# Altium PCB 110-00315-D_B1-DevKit.PcbDoc (part 8 of 9)
Units mil, origin at the board's own origin, x right, y up, seen from the top; angles counter-clockwise.
Board outline 5199.57 x 2702 mil, 8 copper layers (Top Layer, Layer 2-GND-Plane, Layer 3, Layer 4, Layer 5, Layer 6, Layer 7-PWR-Plane, Bottom Layer), stack 60.866 mil thick; 418 components, 298 nets, 1591 pads, 1631 vias.
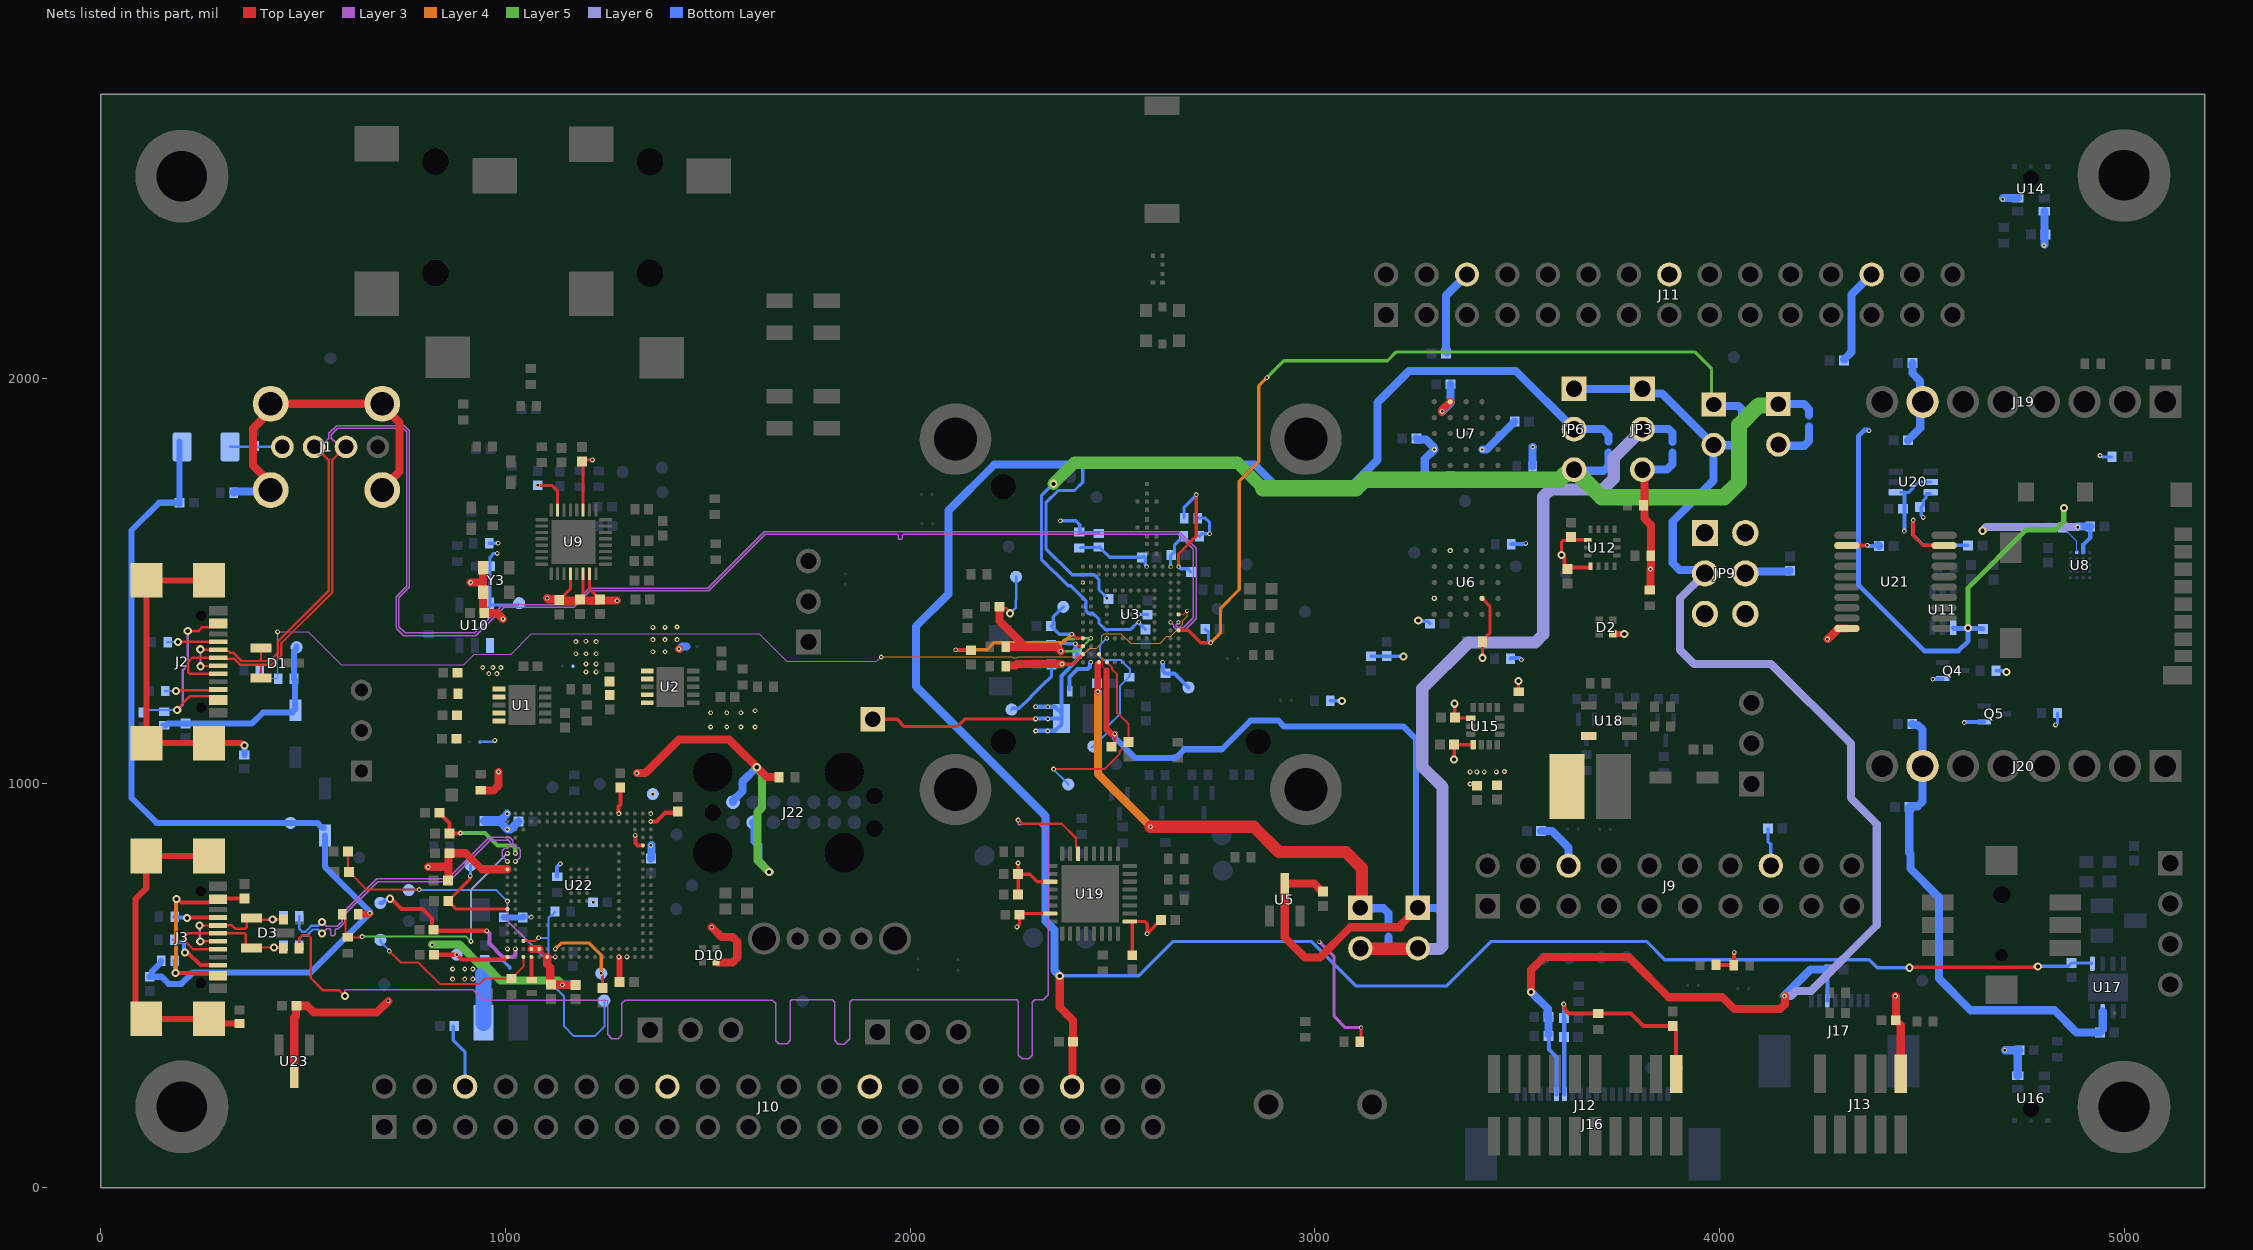
[diagram p13: the nets of this part, all layers, seen from the top]

## Via types
v1: diameter 20, hole 10, Top Layer to Bottom Layer, tented both sides, 773 vias
v2: diameter 12, hole 6, Top Layer to Bottom Layer, tented both sides, 549 vias
v3: diameter 12, hole 6, Top Layer to Bottom Layer, 194 vias
v4: diameter 10, hole 6, Top Layer to Bottom Layer, 101 vias
v5: diameter 10, hole 6, Top Layer to Bottom Layer, tented both sides, 10 vias
v6: diameter 15, hole 8, Top Layer to Bottom Layer, 4 vias

## Nets (pads, with @x,y where several pads share a name; then routed paths per layer and width w, separated by ;. In a path a pad name is that pad's centre, name@x,y a point inside that pad or via, vN(x,y) a via of type N, cw(c..) or ccw(c..) an arc to the next point about the centre after c; other vN are vias at no path point) (continued)
USB_CYP_P: R9.1 U19.14 | length 3575.4
  Top Layer w6: R9.1@489.69,592 489.69,615.95 497.53,623.8 512.53,623.8 518.53,617.8 518.53,518.07 548.8,487.8 589.08,487.8 603.08,473.8 v1(603.58,473.8) ; v2(2266.58,908.8) 2268.2,908.8 2277.2,899.8 2374.44,899.8 2409.71,864.52 2409.71,843.64 2415.05,838.3 U19.14@2415.05,825.3
  Layer 3 w3.5: v1@600.53,470.8 603.08,473.34 v1@603.08,474.3 ; v1(603.58,473.8) v1@603.08,474.3 ; v2(2266.58,908.8) v2@2267.08,908.3 ; v2@2267.53,906.8 2267.08,906.34 2267.08,898.55 2268.84,896.8 2273.08,896.8 2274.08,897.8 2319.48,897.8 2334.53,882.74 2334.53,882.04 2341.08,875.49 2341.08,477.05 2328.32,464.3 2308.32,464.3 2302.03,458 2302.03,327.1 2293.22,318.3 2276.84,318.3 2267.03,328.1 2267.03,460 2262.74,464.3 1856.32,464.3 1850.03,458 1850.03,368.1 1837.22,355.3 1821.84,355.3 1813.03,364.1 1813.03,458 1806.74,464.3 1707.32,464.3 1704.03,461 1704.03,364.1 1696.22,356.3 1674.84,356.3 1667.53,363.6 1667.53,455.6 1659.34,463.8 1295.53,463.8 1287.53,455.8 1287.53,377.6 1278.22,368.3 1262.84,368.3 1252.02,379.12 1252.02,461.75 1249.97,463.8 944.58,463.8 919.58,488.8 604.84,488.8 603.08,487.04 v1@603.08,474.3
USB_D_CC1: J2.A5 R18.1 | length 124.4
  Top Layer w6: v1(190.53,1348.8) 190.95,1349.21 J2.A5@290.03,1349.21
  Bottom Layer w6: R18.1@165.22,1347.8 166.22,1348.8 v1@189.53,1348.8
USB_D_CC2: J2.B5 R19.1 | length 136.6
  Top Layer w6: v1(185.53,1227.8) 187.19,1229.45 288.37,1229.45 J2.B5@290.03,1231.1
  Bottom Layer w6: R19.1@159.22,1227.8 188.53,1227.8 v1@189.53,1226.8
USB_D_SH: FB3.2 J2.S1 J2.S2 J2.S3 J2.S4 | length 830.2
  Top Layer w15: J2.S4@112.67,1098.82 J2.S3@112.67,1500.93 ; J2.S3@112.67,1501.18 J2.S1@267.92,1501.18 ; J2.S4@117.53,1097.8 118.56,1098.82 J2.S2@267.39,1098.82 347.71,1098.82 353.73,1092.8 v1@355.53,1092.8 ; J2.S1@273.53,1485.8 J2.S1@277.53,1489.8
  Bottom Layer w15: FB3.2@354.53,1069.5 v1@354.53,1095.8
  other v1: 354.57,1093.31
USB_D_V: C7.2 FB2.1 J2.A4/B9 J2.B4/A9 | length 505.9
  Top Layer w6: v1(188.53,1180.8) 188.53,1183.8 219.06,1214.32 281.22,1214.32 J2.B4/A9@290.03,1205.51 ; v1@210.53,1380.8 215.53,1375.8 241.53,1375.8 251.41,1385.68 281.22,1385.68 J2.A4/B9@290.03,1394.49
  Layer 3 w6: v1(188.53,1180.8) 202.53,1194.8 202.53,1279.3 214.53,1291.3 v1(214.53,1375.8)
  Bottom Layer w6: C7.2@105.53,1174.51 111.82,1180.8 191.53,1180.8 v1@192.53,1181.8
USB_D_VBUS: C8.2 D4.2 FB2.2 R25.1 TP1.1 | length 493.4
  Bottom Layer w15: FB2.2@153.53,1142.8 160.06,1142.8 164.78,1147.51 C8.2@208.53,1147.51 ; C8.2@210.39,1145.66 212.25,1147.51 373.76,1147.51 400.53,1174.29 473.5,1174.29 473.58,1174.36 D4.2@473.58,1177.8 ; D4.2@480.58,1183.8 479.19,1185.19 479.19,1256.19 R25.1@477.37,1258 477.37,1325.53 483.58,1331.74 TP1.1@483.58,1335.8 TP1.1@483.58,1337.8
USB_DEV_N: D1.1 J1.2 J2.A7 J2.B7 U3.B8 | length 4033.8
  Top Layer w6: v1(245.53,1330.8) 246.17,1330.16 289.39,1330.16 292.93,1326.62 314.7,1326.62 319.58,1321.75 327.58,1321.75 347.53,1301.8 392.02,1301.8 ; v1(246.53,1288.8) 247.21,1289.48 289.35,1289.48 J2.A7@290.03,1290.16 ; D1.1@395.53,1334.2 395.53,1305.31 392.02,1301.8 ; J1.2@527,1828 533.33,1828 562.53,1798.8 562.53,1475.28 436.53,1349.28 436.53,1320.04 418.29,1301.8 392.02,1301.8
  Layer 3 w3.5: J1.2@527,1831 541.19,1831 556.6,1846.41 557.65,1846.41 563.03,1851.8 563.03,1864.25 582.58,1883.8 749.01,1883.8 762.03,1870.78 762.03,1484.05 736.1,1458.13 736.1,1386.47 751.46,1371.11 923.94,1371.11 993.63,1440.8 1165.91,1440.8 1206.91,1481.8 1499.58,1481.8 1639.58,1621.8 2665.48,1621.8 2706.58,1580.7 2706.58,1405.84 2677.53,1376.8 2664.27,1376.8 2663.77,1377.3 2659.32,1377.3 2650.68,1385.94 2650.68,1390.39 2643.7,1397.37 v4(2643.37,1397.37)
  Layer 3 w6: v1@243.53,1330.8 246.03,1328.3 246.03,1289.3 v1(246.53,1288.8)
USB_DEV_P: D1.2 J1.3 J2.A6 J2.B6 U3.A8 | length 4061.5
  Top Layer w6: J2.A6@283.53,1308.8 282.48,1309.84 225.58,1309.84 215.53,1299.8 215.53,1273.99 219.05,1270.47 J2.B6@290.03,1270.47 ; J2.A6@290.03,1309.84 292.93,1306.94 329.66,1306.94 343.8,1292.8 392.02,1292.8 ; D1.2@395.53,1259.4 395.53,1289.28 392.02,1292.8 ; J1.3@605.74,1828 600.74,1828 571.53,1798.8 571.53,1471.55 445.53,1345.55 445.53,1316.31 422.02,1292.8 392.02,1292.8
  Layer 3 w3.5: J1.3@605.74,1831 591.56,1831 576.15,1846.41 574.92,1846.41 569.53,1851.8 569.53,1861.55 585.27,1877.3 746.32,1877.3 755.53,1868.09 755.53,1486.75 729.6,1460.82 729.6,1383.78 731.51,1381.87 748.77,1364.61 926.64,1364.61 996.32,1434.3 1168.61,1434.3 1209.61,1475.3 1502.27,1475.3 1642.27,1615.3 1968.53,1615.3 1970.53,1613.3 1970.53,1604.8 1972.58,1602.75 1978.48,1602.75 1980.53,1604.8 1980.53,1613.3 1982.53,1615.3 2662.79,1615.3 2699.58,1578.5 2699.58,1408.74 2674.63,1383.8 2662.01,1383.8 2657.18,1388.63 2657.18,1391.11 2663.06,1396.99 v4(2663.06,1397.37)
USB_FTDI_N: R5.1 U22.V7 | length 753.9
  Layer 3 w3.5: v1(546.58,656.8) 557.08,646.3 583.91,646.3 596.41,658.8 596.41,678.68 681.03,763.3 857.25,763.3 959.78,865.83 1010.69,865.83 1018.03,858.49 1018.03,846.15 1024.38,839.8 1032.53,839.8 1036.53,835.8 1036.53,816.76 1026.56,806.8 v3@1022.53,806.8
  Bottom Layer w6: R5.1@490.37,671 490.37,639.95 497.53,632.8 505.3,632.8 519.8,647.3 536.06,647.3 545.56,656.8 v1(546.58,656.8)
  other v3: 1024.24,806.78
USB_FTDI_P: R6.1 U22.W7 | length 754.5
  Layer 3 w3.5: v1(546.58,628.8) 557.58,639.8 565.53,639.8 568.53,636.8 568.53,624.8 ; 568.53,624.85 570.58,622.8 575.53,622.8 579.53,626.8 579.53,637.8 581.53,639.8 586.6,639.8 602.91,656.1 602.91,675.98 683.72,756.8 859.94,756.8 962.48,859.33 1006.28,859.33 1011.53,854.08 1011.53,846.15 1004.86,839.47 998.21,839.47 991.53,832.8 991.53,819.8 v3(1004.56,806.78)
  Bottom Layer w6: R6.1@490.37,598 490.37,616.64 497.53,623.8 509.03,623.8 523.53,638.3 536.06,638.3 545.56,628.8 v1(546.58,628.8)
USB_H_SH: FB1.1 J1.5 J1.6 J1.7 J1.8 | length 893.9
  Top Layer w20: J1.7@419.52,1724.31 419.52,1741.39 375.53,1785.38 375.53,1876.62 431.53,1932.62 J1.6@431.53,1940.8 ; J1.6@419.52,1937.69 431.53,1937.69 689.63,1937.69 J1.5@692.37,1934.95 ; J1.8@685.53,1714.73 685.53,1718.32 737.53,1770.32 737.53,1891.69 695.11,1934.11 J1.5@695.11,1937.69
  Bottom Layer w20: FB1.1@328.28,1717.8 328.31,1719.59 329.31,1720.59 424.33,1720.59 J1.7@425.53,1721.8
USB_H_V: C2.2 F1.1 J1.1 | length 129.8
  Bottom Layer w6: F1.1@319.26,1831 443.74,1831 J1.1@447.53,1834.8
USB_U_CC1: J3.A5 R20.1 | length 111.9
  Top Layer w10: v1(212.53,666.8) 213.95,668.21 J3.A5@289.33,668.21
  Bottom Layer w10: R20.1@182.22,669.8 183.72,668.3 214.03,668.3 v1@215.53,666.8
USB_U_CC2: J3.B5 R21.1 | length 146.8
  Top Layer w10: v1(207.53,581.8) 214.53,581.8 246.22,550.1 J3.B5@289.33,550.1
  Bottom Layer w10: R21.1@181.22,612.8 186.22,607.8 199.67,607.8 205.53,601.94 205.53,588.8 v1@212.53,581.8
USB_U_N: D3.1 J3.A7 J3.B7 R5.2 R8.2 | length 322.2
  Top Layer w6: v1(243.53,647.8) 243.9,648.16 288.96,648.16 J3.B7@289.33,648.53 323.8,648.53 332.53,639.8 356.53,639.8 360.05,643.31 360.05,664.31 D3.1@363.53,667.8 ; v1(245.53,608.8) 245.71,608.98 289.15,608.98 J3.A7@289.33,609.16 ; D3.1@390.53,661.8 391.53,662.8 v1(424.53,662.8) 443.49,662.8 447.58,658.71 R8.2@447.58,657.8
  Layer 3 w6: v1(245.53,608.8) 244.53,609.8 244.53,645.8 v1@246.53,647.8
  Bottom Layer w6: v1(424.53,662.8) 443.18,662.8 451,670.62 R5.2@451,671
USB_U_P: D3.2 J3.A6 J3.B6 R6.2 R9.2 | length 423.4
  Top Layer w6: J3.A6@287.53,629.8 286.58,628.84 215.09,628.84 205.53,619.28 205.53,611.8 227.85,589.47 J3.B6@289.33,589.47 ; J3.A6@289.33,628.84 354.48,628.84 358,625.33 D3.2@358,593.8 ; D3.2@351.73,593.8 D3.2@358,593.8 ; D3.2@361.53,586.8 358,590.33 D3.2@358,593.8 ; v1@427.53,589.8 423.53,593.8 D3.2@358,593.8 ; v1@427.69,593.95 v1(427.53,593.8) 448.52,593.8 R9.2@450.32,592
  Bottom Layer w6: v1(427.53,593.8) 446.8,593.8 R6.2@451,598
USB_U_SH: FB5.2 J3.S1 J3.S2 J3.S3 J3.S4 | length 816.6
  Top Layer w15: J3.S4@94.53,416.8 85.53,425.8 85.53,713.8 111.96,740.23 J3.S3@111.96,820.18 J3.S1@266.69,820.18 ; J3.S4@111.96,417.82 112.99,416.8 J3.S2@266.53,416.8 ; J3.S2@257.53,396.8 266.8,406.06 FB5.2@342.53,406.1
USB_U_V: C13.2 FB4.1 J3.A4/B9 J3.B4/A9 | length 480.6
  Top Layer w10: v1(184.53,530.8) 185.06,531.32 282.52,531.32 J3.B4/A9@289.33,524.51 ; v1(186.53,713.8) 188.39,713.8 197.39,704.8 265.83,704.8 267.71,706.68 282.52,706.68 J3.A4/B9@289.33,713.49 ; J3.A4/B9@303.53,710.8 303.53,711.65 306.96,715.08 C13.2@354.53,715.08
  Layer 4 w10: v1(184.53,530.8) 185.53,531.8 185.53,712.8 v1(186.53,713.8)
  Bottom Layer w10: FB4.1@182.26,560.8 183.53,559.53 v1@183.53,535.8
USB_U_VBUS: C1.1 C14.2 D5.2 F1.2 FB4.2 R88.1 TP2.1 | length 2408.5
  Top Layer w15: R88.1@635.69,676 663.78,676 v2@665.58,677.8
  Bottom Layer w15: C14.2@120.53,521.51 149.82,521.51 167.53,503.8 198.53,503.8 226.53,531.8 517.58,531.8 v2(664.58,678.8) ; C14.2@124.53,524.8 125.24,525.5 125.24,533.44 148.8,557 FB4.2@148.83,560.8 ; F1.2@194.58,1843.8 194.58,1688.8 190.37,1693 143.74,1693 75.53,1624.8 75.53,963.8 137.53,901.8 467.53,901.8 TP2.1@469.53,899.8 ; TP2.1@468.53,901.8 534.53,901.8 547.53,888.8 D5.2@551.53,888.8 ; D5.2@553.53,870.8 553.53,793.8 v2@664.53,682.8
USB_VB_T: R25.2 R26.1 U3.A7 | length 2635.4
  Top Layer w3: U3.A7@2663.06,1417.06 2675.84,1417.06 v5(2684.58,1425.8)
  Layer 3 w3: v2(436.58,1373.8) 512.53,1373.8 593.53,1292.8 896.53,1292.8 922.53,1318.8 1014.03,1318.8 1064.03,1368.8 1626.58,1368.8 1694.58,1300.8 1917.58,1300.8 v2(1928.58,1311.8)
  Layer 4 w3: v2(1928.58,1311.8) 2252.73,1311.8 2255.23,1309.3 2263.93,1309.3 2266.43,1311.8 2421.58,1311.8 2443.58,1333.8 2460.58,1333.8 2473.58,1346.8 2473.58,1363.8 2479.58,1369.8 2520.58,1369.8 2544.58,1345.8 2617.58,1345.8 2634.58,1362.8 2643.33,1362.8 2673.56,1393.02 2673.56,1401.78 2684.58,1412.8 v5(2684.58,1425.8)
  Bottom Layer w3: R26.1@392.69,1279 393.53,1278.16 392.53,1277.16 392.53,1264.8 397.53,1259.8 434.53,1259.8 R25.2@435.53,1260.8 ; v2(436.58,1373.8) 436.58,1263.65 R25.2@438,1262.22
USB_VB_T_J: R88.2 R89.1 U22.W6 | length 629.6
  Top Layer w5: R88.2@596.32,676 604.65,667.68 604.65,626.73 R89.1@612.37,619 ; R89.1@610,619 R89.1@612.37,619 ; R89.1@612.58,618.8 R89.1@612.37,619 ; v2@644.58,622.8 644.58,621.69 641.89,619 R89.1@612.37,619
  Layer 5 w5: v2(645.58,620.8) 902.53,620.8 v2(914.53,608.8)
  Layer 6 w5: v2(914.53,608.8) 914.53,736.43 v3(1004.56,826.46)
V_1V8_C: C63.2 C64.2 C76.2 R47.1 TP32.1 U9.19 U9.23 U10.5 | length 491.1
  Top Layer w8: v2@1079.58,1736.8 1080.58,1735.8 1114.58,1735.8 1128.63,1721.74 U9.23@1128.63,1674.74 ; U9.19@1191.63,1674.74 1191.63,1795.84 1194.58,1798.8 v2(1214.58,1798.8)
  Bottom Layer w8: U10.5@956.58,1431.8 961.37,1436.58 U10.5@961.37,1440.27 ; R47.1@959.65,1593.02 959.88,1592.8 v2(981.58,1592.8) ; v2(979.58,1567.8) 970.78,1567.8 961.68,1558.69 C76.2@961.68,1536.02 961.37,1535.71 U10.5@961.37,1440.27 ; TP32.1@1031.56,1441.56 1031.43,1441.56 1030.28,1440.41 1030.28,1440.27 U10.5@961.37,1440.27
  other v2: 1079.58,1735.8
V_1V8_R: C44.2 C45.2 C46.2 C47.2 C48.2 C49.2 C51.2 C55.2 C60.2 C61.2 C62.2 C77.2 C78.2 C79.2 C81.2 C82.2 C84.1 C85.2 C87.1 C88.1 C89.1 C90.1 C91.1 C92.1 C96.1 C98.1 C107.2 C108.2 C109.2 C111.2 C117.2 C131.2 C132.2 C133.2 C134.2 J9.6 J9.16 J10.6 J10.16 J10.26 J11.6 J11.16 J11.26 J12.1 J13.1 J16.7 J22.1 J22.13 JP3.3 JP5.2 JP9.1 Q4.1 Q5.1 R30.2 R31.2 R32.2 R33.1 R34.1 R35.2 R36.2 R49.2 R51.1 R54.2 R77.2 R78.2 R83.2 R84.2 R92.2 R103.1 S2.2 SH3.2 SH5.1 U6.B4 U6.D1 U6.E4 U7.B4 U7.D1 U7.E4 U8.A2 U9.4 U9.6 U9.7 U12.5 U12.8 U14.2 U14.7 U15.5 U15.8 U16.7 U19.1 U19.23 U20.1 U20.5 U21.2 U21.10 U22.A5 U22.D19 U22.W1 U22.W3 Y3.1 Y3.4 | length 6863.3
  Top Layer w8: C61.2@1138.58,1458.23 1160.13,1479.78 U9.4@1160.13,1517.26 ; C60.2@1188.58,1455.8 1191.63,1458.84 U9.6@1191.63,1517.26 ; U9.7@1207.37,1517.26 1207.37,1479.72 C62.2@1226.3,1460.8 ; v2(2263.58,644.8) 2270.3,651.51 C109.2@2270.3,674.8 2273.08,677.58 U19.23@2346.08,677.58 ; U19.1@2543.08,657.9 U19.1@2547.58,657.9 ; C108.2@2548.58,574.8 2548.58,656.9 U19.1@2547.58,657.9 ; v2(2585.53,627.8) 2585.53,652.21 2579.85,657.9 U19.1@2547.58,657.9 ; v2@2585.53,627.96 C107.2@2619.57,662 ; v4(3011.08,607.68) v4@3011.53,608.14 ; R30.2@3111.22,360.8 3114.15,363.73 3114.15,395.41 v4(3114.53,395.8) ; v1(3343.58,1058.8) 3344.3,1059.51 C90.1@3344.3,1095.8 ; v1(3345.58,1196.3) 3345.58,1163.14 C91.1@3346.72,1162 ; C90.1@3348.58,1089.8 3348.58,1091.21 3352.5,1095.14 U15.8@3391.48,1095.14 ; C91.1@3349.47,1160.69 U15.5@3384.98,1160.69 ; U6.B4@3413.37,1456.63 3432.58,1437.43 3432.58,1370.08 3414.26,1351.77 R31.2@3414.26,1349.8 3414.26,1310.11 v1(3414.58,1309.8) ; v1(3503.58,1252.8) 3503.58,1226.11 R54.2@3504,1225.69 ; v1(3609.58,1563.8) 3609.58,1595.19 3614.27,1599.88 3624.37,1599.88 C84.1@3632.58,1608.08 3639.18,1601.48 U12.5@3674.65,1601.48
  Top Layer w10: v1(3609.58,1563.8) 3617.37,1556 3617.37,1536.43 C85.2@3624.58,1529.23 3627.98,1532.63 3680.97,1532.63 3681.05,1532.71 U12.8@3681.05,1536.03 ; v2(3614.58,453.8) 3614.58,453.26 3616.74,451.09 3616.74,442.18 3628.24,430.69 R51.1@3700,430.69 3781.69,430.69 3812.3,400.08 C87.1@3884.58,400.08 3893,391.66 J12.1@3893,281 ; R83.2@3991.26,550.8 3991.66,550.4 4034.92,550.4 R84.2@4035.32,550 4035.32,580.04 4036.53,581.26 v3(4036.53,581.8) ; U21.2@4314.85,1587.03 v2@4364.81,1587.03
  Top Layer w20: v2(913.58,1495.8) 943.58,1495.8 944.52,1496.74 Y3.4@944.52,1532.51 ; 944.52,1495.8 Y3.1@944.52,1471.49 944.52,1423.57 C55.2@947.3,1420.8 978.58,1420.8 v2(993.58,1405.8) ; v2(1102.88,1457) 1105.45,1454.43 1130.37,1454.43 C61.2@1132.58,1452.23 1132.58,1450.8 1180.86,1450.8 1181.37,1451.31 1207.5,1451.31 1208.01,1450.8 1230.86,1450.8 C62.2@1233.58,1453.51 ; C62.2@1235.78,1451.31 v2@1275.58,1451.31 ; v2(1324.53,1024.8) 1345.53,1024.8 1428.53,1107.8 1552.53,1107.8 1645.53,1014.8 R103.1@1675.85,1014.8 ; v2(1428.58,1331.8) v2@1429.06,1331.8 ; v3(3314.53,1918.8) 3314.53,1922.54 U7.D1@3334.61,1942.62 ; JP3.3@3811.53,1773.8 3814.26,1771.06 3814.26,1727.8 ; 3814.26,1740.8 3814.26,1727.8 ; R78.2@3827.53,1477.48 3828.75,1477.48 3829.58,1478.31 v2(3829.58,1528.8) 3830.26,1529.48 R49.2@3830.26,1561.8 3830.26,1638.06 3814.26,1654.06 3814.26,1727.8 ; v2(4266.58,1355.8) 4267.99,1355.8 4294.49,1382.3 U21.10@4314.85,1382.3 ; v2(4434.58,473.8) 4435.72,472.66 C88.1@4435.72,414 4448,401.72 J13.1@4448,282
  Layer 3 w8: v4(3011.08,607.68) 3047.58,571.18 3047.58,423.8 3075.58,395.8 v4(3114.53,395.8)
  Layer 5 w20: v1@1619.53,1037.8 1633.53,1023.8 1633.53,939.8 1622.53,928.8 1622.53,809.8 v1(1651.53,780.8)
  Layer 6 w20: v1(4649.58,1623.8) 4658.53,1632.75 v2(4885.05,1632.75)
  Bottom Layer w8: C79.2@870.53,399.8 870.53,364.8 900,335.32 J10.6@900,250 ; R33.1@3038.26,1203.8 3065.58,1203.8 v1(3066.58,1202.8) ; C46.2@3138.58,1313.51 3217.86,1313.51 v1(3218.58,1312.8) ; v1(3255.58,1401.8) 3257.26,1400.11 3278.5,1400.11 C47.2@3284.82,1393.8 ; C78.2@4119.57,888 4119.57,855.81 4126.58,848.8 J9.16@4126.58,804.8 ; U20.1@4448,1718 4466,1718 4492.25,1744.25 U20.5@4522.31,1744.25
  Bottom Layer w10: R92.2@1127.53,768.8 1127.53,792.8 v3(1135.53,800.8) ; R32.2@3483.22,1307.8 3484.22,1308.8 3505.99,1308.8 3509.99,1304.8 v3(3510.53,1304.8) ; R34.1@3485.22,1590.8 3519.53,1590.8 v4(3521.53,1592.8) ; v2(3614.58,453.8) 3614.58,453.26 3615.57,452.26 C96.1@3615.57,420 3616.32,419.26 3616.32,231.75 J16.7@3617.06,231 ; v2(4365.58,1587.8) 4366.12,1587.8 4367.66,1586.25 C117.2@4394.29,1586.25 ; v2(4456.58,1622.8) 4456.79,1623.01 4456.79,1694.04 4457,1694.25 4457,1718 ; v2@4529.29,1257.8 Q4.1@4550.66,1257.8 ; v2@4604.12,1151.25 Q5.1@4654,1151.25 ; U8.A2@4899,1570.5 4899,1589.22 4916.29,1606.51 C51.2@4916.29,1634
  Bottom Layer w20: v3@1004,924.33 988.67,909 949.45,909 C134.2@947.25,906.8 949.45,904.59 985.48,904.59 v3(1004.56,885.52) ; v3@1004.56,885.29 1012.31,885.29 C133.2@1031.82,904.8 ; C132.2@1359.53,813.8 1360.53,814.8 v3@1360.53,846.8 ; v2@1429.35,1331.57 1435.78,1338 S2.2@1446.7,1338 ; J22.1@1562,953 1562,956.79 1585.27,980.05 1585.27,1003.89 v1(1620.69,1039.3) ; J22.13@1612,903 1614.68,900.32 1614.68,856.65 1625.53,845.8 1625.53,806.8 v1(1651.53,780.8) ; C49.2@3251.33,1851.88 3253.53,1849.67 3274.82,1849.67 3294.61,1829.88 v3@3294.61,1825.88 ; v3(3295.24,1824.51) 3271.61,1800.88 3271.61,1769.59 3283.33,1757.88 R35.2@3334.93,1757.88 ; v3(3314.53,1918.8) 3335.33,1939.59 C45.2@3335.33,1985.88 ; C81.2@3326.53,2063.8 3324.53,2065.8 3324.53,2205.53 J11.6@3376,2257 J11.6@3377.36,2258.36 ; v3@3414.61,1824.88 3424.89,1824.88 C48.2@3493.89,1893.88 ; R36.2@3538.3,1782.88 3538.3,1830.56 v3(3538.53,1830.8) ; C77.2@3559.3,881.8 3559.57,881.52 3585.86,881.52 3626.76,840.61 3626.76,796.24 J9.6@3627,796 ; JP3.3@3807.53,1776.8 3809.3,1775.02 3870.04,1775.02 3883.53,1788.51 SH3.2@3883.53,1816.5 ; JP5.2@4146.53,1833.8 4209.82,1833.8 4221.53,1845.51 SH5.1@4221.53,1881.5 ; C82.2@4307.53,2046.8 4309.25,2046.8 4309.45,2047 4309.45,2048.72 4326.53,2065.8 4326.53,2207.53 J11.26@4376,2257 J11.26@4376.86,2257.86 ; C117.2@4392.08,1588.46 C117.2@4394.29,1586.25 ; v2@4700.58,2445.71 U14.2@4737.01,2445.71 ; v2@4705.58,340 C92.1@4741.29,340 4737.01,335.73 U16.7@4737.01,276.66 ; v2@4803,2330.8 U14.7@4803,2413.35 ; v2@4884.58,1634 C51.2@4916.29,1634
  other v2: 4705.05,339.75 4605.05,1149.75 4527.05,1256.75 1364.05,1324.75 1394.05,1324.75 1364.05,1354.75 1394.05,1354.75 1424.05,1354.75 1364.05,1384.75 1394.05,1384.75 1423.58,1385.8 1275.58,1450.8 3295.26,1456.63 3334.63,1574.74 4802.05,2328.75 4700.05,2442.75
  other v3: 1299.83,570.56 1216.26,705.66 1358.89,846.15 1004.56,924.89 3413.35,1824.51
V_3V3: C52.1 C83.2 C99.2 C102.1 C103.1 C113.2 C114.2 C120.2 C121.2 C122.2 C123.2 C135.2 C144.2 J16.6 J17.3 J19.7 JP1.2 JP3.1 JP6.1 JP9.3 R14.1 S1.2 SH1.1 U8.A3 U11.1 U22.P19 U22.R18 U22.T18 U22.W8 U23.3 | length 6703.8
  Top Layer w5: U22.R18@1083.3,590.24 U22.P19@1102.98,570.56
  Top Layer w20: U23.3@477.83,272.8 477.83,419.1 cw(c482.53,419.1) 482.53,423.8 482.53,447.8 ccw(c481.53,447.8) C144.2@481.53,448.8 ; C144.2@483.25,449.8 509.53,449.8 526.53,432.8 681.53,432.8 v4(710.53,461.8) ; v3(808.53,792.8) 809.03,793.3 859.25,793.3 ; C120.2@857.25,759.8 859.25,761.8 859.25,793.3 ; R14.1@939,982.32 970.82,982.32 982.53,994.03 v2(982.53,1027.8) ; U22.W8@1004.56,787.09 941.24,787.09 901.53,826.8 C122.2@861.25,826.8 859.25,824.8 859.25,793.3 ; U22.T18@1063.61,590.24 U22.R18@1083.3,590.24 ; U22.P19@1102.98,570.56 1102.98,551.9 1110.37,544.51 1110.37,504.51 C123.2@1112.58,502.31 1113.09,501.8 v3(1140.53,501.8) 1140.82,501.51 C121.2@1172.53,501.51 ; v1(3534.58,483.8) 3534.58,537.8 3566.92,570.14 3775.24,570.14 3783.55,561.83 3874.58,470.8 4007.58,470.8 4036.58,441.8 4149.86,441.8 4161.58,453.51 v2@4161.58,473.8
  Layer 5 w12: v1(4614.57,1383.31) 4614.57,1482.84 4757.53,1625.8 4830.53,1625.8 4851.53,1646.8 v1(4851.53,1679.8)
  Layer 5 w20: v3(818.53,600.8) 885.78,600.8 934.78,551.8 947.59,551.8 987.59,511.8 1130.53,511.8 v3(1140.53,501.8) ; J19.7@4493.58,1943.8 4500.46,1943.8 J19.7@4502,1942.25
  Layer 6 w20: JP9.3@3964,1518.25 3902.58,1456.83 3902.58,1328.8 3936.58,1294.8 4127.58,1294.8 4324.58,1097.8 4324.58,962.8 4388.58,898.8 4388.58,648.8 4226.12,486.34 4189.34,486.34 4176.8,473.8 v2(4160.58,473.8)
  Bottom Layer w3: C52.1@4848.25,1632.8 4883.26,1597.79 U8.A3@4883.26,1570.5
  Bottom Layer w10: C102.1@3578.58,378.8 3578.58,341.8 3597.37,323 J16.6@3597.37,231 ; J17.3@4265.69,462.69 4267.37,464.37 C103.1@4267.37,535.59
  Bottom Layer w12: v4(4369.53,1870.8) 4368,1872.33 4358.06,1872.33 4343.77,1858.04 4343.77,1489.56 4506.53,1326.8 4590.53,1326.8 4614.3,1350.56 v1@4614.3,1382.24 ; U11.1@4577.59,1383.75 4579.11,1382.24 v1@4614.3,1382.24 ; C83.2@4651,1380.72 4649.49,1382.24 v1@4614.3,1382.24 ; C52.1@4849.53,1634.8 4850.39,1635.66 4850.39,1678.66 v1(4851.53,1679.8)
  Bottom Layer w20: v3@1142.53,501.8 1172.25,501.8 C135.2@1173.53,500.51 ; v1(3534.58,483.8) 3575.52,442.86 3575.52,424.21 C99.2@3576.29,424.21 ; C102.1@3577.72,378.8 C99.2@3577.72,422 ; JP6.1@3640.53,1974.8 3641.53,1973.8 3809.53,1973.8 3820.33,1963 3858.33,1963 JP1.2@3985.53,1835.8 3985.53,1747.8 3884.58,1646.84 3884.58,1543.8 3901.52,1526.85 3955.41,1526.85 JP9.3@3964,1518.25 ; JP1.2@3969.53,1830.8 3973.82,1835.08 4043.82,1835.08 4055.53,1846.8 SH1.1@4055.53,1873.5 ; v2(4160.58,473.8) 4160.58,474.8 4224.78,539 4269.08,539 C103.1@4269.08,540.8 ; C114.2@4465.72,1847.25 4496.21,1877.74 4496.21,1935.43 J19.7@4500.58,1939.8 ; C113.2@4476.72,2038 4477.47,2037.26 4477.47,2011.91 4495.16,1994.21 J19.7@4495.16,1949.09
  other v2: 1198.72,1274.82 1223.72,1274.82 1198.72,1294.82 1223.72,1294.82 1173.72,1319.82 1198.72,1319.82 1223.72,1319.82 1173.72,1349.82 1223.72,1349.82 1198.58,1350.8
V_CON_IO: C110.2 C112.1 C118.1 JP9.2 JP9.4 JP9.6 R72.1 R73.1 R74.1 U20.6 U21.19 | length 586.7
  Top Layer w8: v2(4479,1650) 4479,1611.38 4502.96,1587.41 4554.62,1587.41 U21.19@4555,1587.03
  Bottom Layer w8: v2(4479,1650) 4479,1612.38 4503.58,1587.8 4613.74,1587.8 C118.1@4614.29,1587.25 ; v2(4503.58,1656.8) 4498.5,1661.87 4498.5,1682 4503.49,1686.98 4503.49,1698.49 4510.28,1705.28 4510.28,1714.79 4510.49,1715 U20.6@4520,1715 ; R73.1@4683.26,1277.8 4706.58,1277.8 v1(4709.58,1274.8) ; v2@4830.58,1142.8 4835.37,1147.59 R74.1@4835.37,1173.25 ; v2(4940.58,1809.8) 4941.66,1809.8 4945.2,1806.25 R72.1@4970.32,1806.25
  Bottom Layer w20: JP9.4@4064,1518.25 4068.37,1522.62 4171.8,1522.62 C110.2@4174,1524.82
  other v2: 4830.58,1143.8
VDD_BUCK: C19.2 JP2.1 SH2.2 U3.L13 | length 1226.4
  Top Layer w3: U3.L13@2463.53,1294.65 2466.21,1297.32 U3.L13@2466.21,1298.95
  Top Layer w15: v2@2463.53,1226.8 U3.L13@2463.53,1294.65
  Top Layer w30: v2(2593.82,892.25) 2849.08,892.25 2911.53,829.8 3076.53,829.8 3116.53,789.8 JP2.1@3116.53,708.8
  Layer 4 w20: v2(2463.82,1226.25) 2463.82,1022.51 v2@2593.53,892.8
  Bottom Layer w3: C19.2@2461.86,1246.8 C19.2@2463.82,1244.84 ; v2@2463.53,1225.8 2463.82,1226.08 v2(2463.82,1226.25)
  Bottom Layer w15: v2(2463.82,1226.25) C19.2@2463.82,1244.84
  Bottom Layer w20: JP2.1@3120.53,690.8 3169.82,690.8 3181.53,679.08 SH2.2@3181.53,647.1
VDD_CORE_0V8: C17.2 C21.2 C22.2 FB8.1 FB9.2 FB12.1 L2.2 R17.2 TP12.1 U3.F7 U3.N3 U3.N11 | length 1157.3
  Top Layer w8: TP12.1@1907.58,1157.8 1967.58,1157.8 1985.58,1139.8 2116.58,1139.8 2135.57,1158.79 v2@2308.57,1158.79 ; v2(2408.04,1344.4) 2409.12,1344.4 2414.72,1338.8 2426.36,1338.8 U3.N11@2426.84,1338.32
  Bottom Layer w8: C21.2@2348.3,1341.8 2352.3,1345.8 2386.04,1345.8 2387.44,1344.4 v2(2408.04,1344.4) ; v2@2370,1648 2370.63,1648.63 2409.37,1648.63 2419,1639 2419,1625.68 2421,1623.68 R17.2@2418,1620.69 ; R17.2@2418,1618.69 2464.01,1618.69 FB12.1@2466,1616.7 ; v4(2564.63,1417.06) 2585.6,1417.06 C22.2@2586.58,1416.08 ; FB8.1@2710.7,1655 2729,1655 2739.83,1644.17 v2@2739.83,1616.17 ; FB9.2@2714.69,1610 2720.97,1616.29 v2(2739.83,1616.29)
  Bottom Layer w10: v2@2309.58,1128.8 2310.38,1128.8 2311.09,1129.5 2357.5,1129.5 2373.5,1145.5 L2.2@2373.5,1160 ; v2@2309.58,1157.8 2311.78,1160 L2.2@2373.5,1160 ; v2(2309.83,1188.79) v2(2339.83,1188.79) 2357.5,1188.79 L2.2@2373.5,1172.79 ; v2(2408.04,1344.4) 2408.42,1344.01 2408.42,1326.16 2407.96,1325.7 C17.2@2412.86,1320.8 ; C17.2@2412.63,1320.8 2412.63,1304.43 2373.5,1265.3 L2.2@2373.5,1172.79 ; L2.2@2373.5,1160 L2.2@2373.5,1172.79
  other v2: 2309.83,1128.79 2339.83,1128.79 2309.83,1158.79 2339.83,1158.79 2371.01,1648.63
  other v4: 2426.84,1495.8
VDD_CORE_0V8_J: C119.2 C124.2 C125.2 C126.2 C127.2 C128.2 C129.1 C130.1 L8.2 TP45.1 U22.A1 U22.A2 U22.B5 U22.E1 U22.E19 U22.V6 U22.W18 | length 748.6
  Top Layer w10: C127.2@836.25,926.8 861.25,901.8 C128.2@861.25,875.8 886.99,875.8 887.99,876.8 v3(888.53,876.8) ; v3(1280.15,924.89) 1279.53,925.5 1279.53,942.8 1283.53,946.8 C130.1@1283.53,989.08 ; v3(1320.53,870.8) 1320.53,852 1326.39,846.15 U22.B5@1339.2,846.15 ; v3(1358.89,905.2) 1372.94,905.2 1394.53,926.8 C129.1@1424.82,926.8
  Top Layer w15: v3(1280.15,570.56) 1281.82,568.89 C126.2@1281.82,508.8
  Layer 5 w10: v3(888.53,876.8) 949.53,876.8 980.18,846.15 1018,846.15 1023.86,840.29 1023.86,826.84 v3(1024.24,826.46)
  Bottom Layer w8: C124.2@956,561.72 993.5,561.72 1010.5,544.72 1010.5,542 ; C119.2@1044.53,668.95 1062.43,668.95 v3@1062.58,668.8
  Bottom Layer w15: C125.2@995.53,668.51 996.03,668.01 1042.75,668.01 C119.2@1044.53,669.8
  Bottom Layer w40: 944.53,526.8 945.62,525.71 L8.2@945.62,407.8
  other v2: 869.07,515.63 899.07,515.63 919.07,515.63 869.07,540.63 899.07,540.63 919.07,540.63 1364,973
  other v3: 1004.56,590.24 1063.58,668.95 1358.89,924.89
VDD_IO_FLEX: C26.2 C80.2 C93.2 J10.36 JP6.2 SH6.2 U3.K5 U17.5 | length 6807.4
  Top Layer w8: v1(4469.58,543.8) 4471.08,545.3 4785.08,545.3 v1(4786.58,546.8)
  Top Layer w20: v1(2369.58,523.8) 2369.58,446.8 2402.72,413.66 C80.2@2402.72,361 2401.36,359.64 2401.36,251.36 J10.36@2400,250
  Bottom Layer w8: v1(2369.58,523.8) 2564.58,523.8 2649.58,608.8 2991.53,608.8 3101.53,498.8 3326.22,498.8 3436.22,608.8 3819.58,608.8 3864.58,563.8 4369.58,563.8 4389.58,543.8 v1(4469.58,543.8) ; 2429.53,1787 2426.53,1784 2426.53,1743.8 2405.93,1723.2 2365.4,1723.2 2335.3,1693.1 2335.3,1579.46 2399.96,1514.8 2454.53,1514.8 2466.53,1502.8 2466.53,1478.13 2485.89,1458.77 v4(2485.89,1456.43) C26.2@2486.1,1456.63 ; v1(4786.58,546.8) 4787.3,547.51 4861.8,547.51 C93.2@4870,555.72 4917.66,555.72 U17.5@4919.58,553.8
  Bottom Layer w20: v1(2369.58,523.8) 2356.58,536.8 2356.58,636.8 2334.58,658.8 2334.58,918.8 2014.53,1238.84 2014.53,1387.75 2094.58,1467.8 2094.58,1673.8 2207.78,1787 2429.53,1787 2851.38,1787 2914.58,1723.8 3079.53,1723.8 3154.53,1798.8 3154.53,1940.8 3232.53,2018.8 3496.53,2018.8 JP6.2@3640.53,1874.8 3711.53,1874.8 3725.53,1860.8 SH6.2@3725.53,1844.1
VDD_LNA_0V8: C86.1 FB12.2 R17.1 U3.E1 | length 191.2
  Bottom Layer w8: R17.1@2421,1582 2421.31,1582.31 2465.01,1582.31 FB12.2@2466,1583.3 ; FB12.2@2467,1584 2467.25,1584 2474.8,1576.45 2474.8,1576.2 2493,1558 C86.1@2573.28,1558 ; C86.1@2577.11,1560.6 2580.78,1556.93 2580.78,1539.25 2584.32,1535.71 v4(2584.32,1535.17)
VDD_MAIN: C20.2 C43.2 JP4.1 SH4.2 U3.L12 U5.3 | length 2257
  Top Layer w3: U3.L12@2466.21,1318.63 2476.14,1308.7 2476.14,1288.18 2486.53,1277.8
  Top Layer w8: C20.2@2494.58,1087.8 2495.3,1087.8 2505.5,1098 v2(2505.53,1121.8)
  Top Layer w15: 2485.53,1277.8 2485.53,1132.84 2496.58,1121.8 v2(2505.53,1121.8) ; JP4.1@3254.53,691.8 JP4.1@3257.53,694.8
  Top Layer w20: C43.2@3016.53,733.8 2998.53,751.8 U5.3@2925.53,751.8 2925.53,618.8 2975.53,568.8 3012.53,568.8 3087.53,643.8 3211.53,643.8 3211.53,648.8 3260.53,697.8 JP4.1@3263.53,697.8
  Bottom Layer w8: JP4.1@3247.53,686.8 3249.53,688.8 JP4.1@3249.53,689.8
  Bottom Layer w15: v2(2505.53,1121.8) 2505.53,1112.84 2556.58,1061.8 2655.58,1061.8 2676.58,1082.8 ; 2676.58,1083.8 2770.58,1083.8 2841.58,1154.8 2909.53,1154.8 2924.53,1139.8 3219.53,1139.8 3249.53,1109.8 JP4.1@3249.53,689.8
  Bottom Layer w20: JP4.1@3255.53,691.8 3302.82,691.8 3314.53,680.08 SH4.2@3314.53,650.1
VDD_MIPI_0V8: C30.2 TP13.1 U3.C13 | length 101.8
  Bottom Layer w10: v4(2623.69,1298.95) 2624.07,1298.56 2624.07,1278.02 C30.2@2630.58,1271.51 2652.75,1271.51 TP13.1@2687.63,1236.63
VDD_MIPI_0V8_J: C143.2 TP46.1 U22.W13 | length 265.5
  Top Layer w8: v2(912.53,770.8) 911.77,770.03 911.77,762.32 C143.2@858.25,708.8 878.38,688.67 U22.W13@1004.56,688.67
  Bottom Layer w8: v2(912.53,770.8) 913.03,771.3 913.03,796.3 TP46.1@913.53,796.8
VDD_MIPI_1V8_J: C139.2 C140.2 TP49.1 U22.N19 U22.W12 | length 701.8
  Top Layer w5: C140.2@610.25,830.8 610.25,783.8 C139.2@613.25,780.8 657.25,736.8 v3(786.53,736.8)
  Layer 3 w5: v3(1004.56,708.35) 1004.56,659.77 1093.77,570.56 v3(1122.67,570.56)
  Bottom Layer w5: TP49.1@760.53,735.8 977.11,735.8 v3(1004.56,708.35)
VDD_SOC: JP2.2 JP3.2 JP4.2 SH2.1 SH3.1 SH4.1 | length 2187.8
  Top Layer w10: JP2.2@3112.53,591.8 JP2.2@3113.53,590.8 ; JP4.2@3246.53,590.8 JP4.2@3248.53,592.8
  Top Layer w30: JP2.2@3113.53,590.8 JP4.2@3246.53,590.8
  Layer 6 w30: JP4.2@3249.53,589.8 3308.53,589.8 3315.53,596.8 3315.53,990.8 3265.53,1040.8 3265.53,1233.8 3379.53,1347.8 3544.53,1347.8 3564.53,1367.8 3564.53,1708.22 3582.11,1725.8 3711.53,1725.8 3738.53,1752.8 3738.53,1803.8 JP3.2@3809.53,1874.8
  Bottom Layer w20: JP2.2@3107.53,584.8 3169.82,584.8 3181.53,596.51 SH2.1@3181.53,620.5 ; JP4.2@3252.53,590.8 3304.7,590.8 3314.53,600.63 SH4.1@3314.53,623.5 ; JP3.2@3817.53,1872.8 3819.53,1874.8 3874.7,1874.8 3883.53,1865.97 SH3.1@3883.53,1843.1
VDD_SX_0V8: C23.1 FB8.2 U3.A1 | length 302
  Top Layer w8: v4(2663.06,1535.17) 2663.06,1566.28 2707,1610.22 2707,1667.65 v2(2707,1713)
  Bottom Layer w8: v4@2663,1535.2 2663.57,1535.2 2668.96,1529.8 2685.68,1529.8 C23.1@2693.88,1521.6 ; FB8.2@2676.85,1656 2676.85,1681.76 2707,1711.92 v2(2707,1713)
VDD_TRX_0V8: C24.1 FB9.1 U3.B1 | length 74.8
  Bottom Layer w8: v4(2643.37,1535.17) C24.1@2643.37,1563.43 ; C24.1@2645.08,1563.8 2653.29,1572 2653.29,1588.69 FB9.1@2666.2,1601.6
VDD_USB_3V3: C18.2 JP1.1 SH1.2 U3.A9 | length 2178.4
  Top Layer w8: U3.A9@2663.06,1377.69 U3.A9@2663.06,1377.69 2686.64,1377.69 2717.53,1346.8 v2(2742.53,1346.8) v2@2743.53,1346.8
  Layer 5 w8: v2(2881.58,2001.8) 2923.58,2043.8 3179.53,2043.8 3201.53,2065.8 3938.53,2065.8 3980.53,2023.8 3980.53,1940.8 JP1.1@3985.53,1935.8
  Layer 4 w8: v2(2742.53,1346.8) 2766.94,1371.2 2766.94,1432.54 2812.96,1478.56 2812.96,1746.18 2861.58,1794.8 2861.58,1981.8 v2(2881.58,2001.8)
  Bottom Layer w8: C18.2@2729.1,1380.8 2737.3,1372.59 2737.3,1353.11 2743.53,1346.88 v2@2743.53,1346.8
  Bottom Layer w20: JP1.1@3982.53,1931.8 4046.7,1931.8 4055.53,1922.97 SH1.2@4055.53,1900.1
VDDIO_1V8: C25.2 JP5.1 JP6.3 SH5.2 SH6.1 U3.F8 | length 2832
  Layer 5 w30: v1(2353.74,1739.8) 2405.74,1791.8 2809.11,1791.8 2872.11,1728.8
  Layer 5 w40: 2872.11,1728.8 3101.53,1728.8 3120.53,1747.8 ; 3122.53,1749.8 3604.43,1749.8 3618.92,1764.29 3624.33,1764.29 3634.84,1774.8 JP6.3@3640.53,1774.8 3708.85,1706.48 4011.22,1706.48 4048.53,1743.8 4048.53,1884.8 4097.25,1933.51 4145.25,1933.51 JP5.1@4145.53,1933.8
  Bottom Layer w8: v1(2353.74,1739.8) 2324.3,1710.36 2324.3,1553.69 2390.43,1487.56 2397,1487.56 2434.59,1449.98 2434.59,1443.19 2433.52,1442.13 2433.52,1431.36 2434.59,1430.29 2434.59,1424.79 2439.58,1419.8 2451.58,1419.8 2466.58,1404.8 2466.58,1394.8 2481.58,1379.8 2544.53,1379.8 v4@2562.91,1398.18 ; v4@2564.58,1396.51 C25.2@2581.58,1379.51
  Bottom Layer w20: JP6.3@3645.53,1770.8 3646.82,1772.08 3713.82,1772.08 3725.53,1783.8 SH6.1@3725.53,1817.5 ; JP5.1@4152.53,1936.8 4208.53,1936.8 4221.53,1923.8 SH5.2@4221.53,1908.1
  other v4: 2564.63,1397.37
VIN_RAW: C3.2 C6.2 C9.2 C12.2 C75.2 C94.1 C100.2 C101.1 C104.2 C105.2 C115.2 C116.2 D2.1 D10.1 J20.7 JP9.5 L6.1 R46.2 S3.2 U1.1 U1.2 U1.4 U1.5 U2.1 U2.2 U2.4 U2.5 U10.1 U17.3 U18.5 U19.19 | length 1611.9
  Top Layer w8: C104.2@2266.72,725 C105.2@2266.72,775 ; v2(2266.72,802.66) C105.2@2266.72,775 ; U19.19@2346.08,756.32 2314.05,756.32 2295.37,775 C105.2@2266.72,775
  Top Layer w15: D2.1@3736.31,1369.06 3764.31,1369.06 v1(3764.58,1368.8)
  Top Layer w20: v2(1509.58,643.8) 1533.58,619.8 1560.82,619.8 1572.53,608.08 1572.53,568.51 1560.82,556.8 D10.1@1523.53,556.8
  Bottom Layer w6: S3.2@936.88,1101.8 967.96,1101.8 971.96,1105.8 v2(973.58,1105.8)
  Bottom Layer w20: C115.2@4476.44,1146.25 4478.64,1144.05 4489.86,1144.05 4501.58,1132.33 4501.58,1042.68 J20.7@4502,1042.25 4501.58,1041.83 4501.58,954.72 4489.86,943 4471.22,943 C116.2@4469.01,940.8 4469.01,827.36 4471.58,824.8 4471.58,788.8 4542.58,717.8 4542.58,516.8 4620.58,438.8 4827.58,438.8 4882.37,384 C94.1@4940.29,384 4947.21,390.92 U17.3@4947.21,436
  other v2: 3383.53,997.8 3383.53,1027.8 3400.53,1027.8 3418.53,1027.8 3448.53,1027.8 3468.53,1028.8 1506.53,1138.8 1546.53,1138.8 1581.53,1138.8 1616.53,1138.8 1506.53,1173.8 1546.53,1173.8 1581.53,1173.8 1616.53,1178.8 958.58,1270.8 978.58,1270.8 943.58,1285.8 968.58,1285.8 988.58,1285.8
VREF_P: C27.2 TP18.1 U3.K13 | length 490.6
  Top Layer w5: v2(2354.53,1034.8) 2479.53,1034.8 2517.53,1072.8 2517.53,1079.18 C27.2@2539.58,1101.23 2539.58,1145.8 2511.58,1173.8 2511.58,1268.9 2498.58,1281.9 2498.58,1286.26 U3.K13@2485.89,1298.95
  Bottom Layer w5: v2@2353.53,1035.8 2353.53,1034.8 2390.53,997.8 TP18.1@2390.53,996.8
VREF_P_J: C136.2 TP52.1 U22.N18 | length 214.8
  Top Layer w8: v2(1236.53,529.8) 1236.53,528.71 1239.53,525.71 C136.2@1239.53,493.51
  Layer 4 w8: v3(1122.67,590.24) 1137.22,604.8 1206.54,604.8 1236.53,574.8 v2(1236.53,529.8)
VREG_AON: R22.2 TP17.1 U3.K10 | length 374.3
  Bottom Layer w5: TP17.1@2447.53,1088.8 2450.53,1088.8 2485.53,1123.8 2485.53,1138.75 2518.56,1171.77 2518.56,1240.47 2541.53,1263.45 R22.2@2541.53,1268.8 ; 2468.5,1312.8 2468.5,1340.61 v4(2485.89,1358) ; 2468.58,1312.8 2477.58,1303.8 2520.58,1303.8 2543.53,1280.84 R22.2@2543.53,1267.8
VREG_AON_J: R85.2 TP51.1 U22.U17 | length 555.9
  Top Layer w5: U22.U17@1043.93,609.93 1071.77,609.93 1079.64,617.8 v3@1080.53,617.8
  Bottom Layer w5: v3(1081.53,617.8) 1106.53,617.8 ; 1106.53,510.8 1144.53,472.8 1144.53,398.8 1168.53,374.8 1220.53,374.8 1244,398.27 TP51.1@1244,463 ; 1106.58,510.8 1106.58,667.53 1111.55,672.5 1113.52,672.5 1121.85,680.83 R85.2@1121.85,682.8
VREG_AUX_1V8_J: C142.2 TP47.1 U22.V18 | length 443
  Top Layer w10: v1@716.53,714.8 742.53,688.8 794.53,688.8 818.33,665 818.33,641.72 C142.2@822.25,637.8 824.87,635.18 953.15,635.18 v2(953.53,634.8)
  Layer 3 w10: v2(953.53,634.8) 960.11,628.22 960.11,603.22 992.77,570.56 1018.39,570.56 1024.24,576.41 v3(1024.24,590.24)
  Bottom Layer w10: TP47.1@690.53,703.8 695.94,703.8 704.54,712.39 713.13,712.39 v1@716.53,715.8
  other v1: 714.57,714.31
VREG_DIG_1V8: C33.2 R23.2 TP15.1 U3.M10 | length 577.9
  Top Layer w6: C33.2@2220.53,1433.59 2221.48,1432.65 2237.47,1432.65 2246.53,1423.59 v1(2246.53,1419.8)
  Top Layer w20: C33.2@2220.53,1433.59 2220.53,1400.8 2246.69,1374.64 2281.53,1339.8 2281.53,1336.8 ; R23.2@2236.22,1336.8 2281.53,1336.8 ; v2(2372.53,1325.8) 2361.53,1336.8 2281.53,1336.8
  Layer 5 w6: v2@2373.53,1325.8 2414.32,1325.8 v4(2446.52,1358) 2406.75,1358 2405.15,1356.4 2404.9,1356.4 2404.3,1355.8 2382.53,1355.8 2372.53,1345.8 2372.53,1327.8 v2@2373.53,1326.8
  Bottom Layer w6: v1@2246.58,1419.8 2261.3,1434.52 2261.3,1452.52 2261.58,1452.8 TP15.1@2261.58,1509.8
VREG_DIG_1V8_J: R86.2 TP48.1 U22.U19 | length 444.9
  Top Layer w5: v3(712.53,584.8) 740.53,556.8 784.53,556.8 837.53,503.8 936.53,503.8 949.9,517.17 R86.2@1014.53,517.17 1016.5,517.17 1024.83,525.49 1024.83,527.46 1043.93,546.56 U22.U19@1043.93,570.56
  Bottom Layer w5: TP48.1@690.53,612.8 690.53,608.69 712.53,586.69 v3(712.53,584.8)
VREG_LP_1V8: C34.1 R24.2 TP16.1 U3.N12 | length 391.7
  Top Layer w8: v2(2375.1,1294.47) 2375.21,1294.47 v2@2375.53,1294.8 ; v2@2376.58,1293.8 2402,1293.8 U3.N12@2426.84,1318.63
  Top Layer w20: R24.2@2236.22,1288.8 2236.22,1289.84 2237.04,1290.66 2260.4,1290.66 2264.21,1294.47 v2(2375.1,1294.47)
  Bottom Layer w8: TP16.1@2250.58,1181.8 2253.67,1184.89 2269.67,1184.89 2297.43,1212.65 2297.43,1213.04 2325.19,1240.8 2325.58,1240.8 2349.3,1264.51 C34.1@2349.3,1292.8 2350.97,1294.47 2374.9,1294.47 v2@2375.58,1293.8
VREG_LP_1V8_J: C138.2 TP50.1 U22.W19 | length 189.3
  Top Layer w10: C138.2@823.25,575.8 823.35,575.9 878.9,575.9 v2(879,576) 891.21,563.8 997.8,563.8 U22.W19@1004.56,570.56
VREG_MIPI_1V8: C28.2 C29.2 TP14.1 U3.N10 | length 483.6
  Top Layer w8: v2(2112.53,1329.8) 2149.25,1329.8 C29.2@2150.53,1328.51 ; v2@2401.62,1366.84 2409.66,1358.8 2416.58,1358.8 2417.18,1358.19 2426.65,1358.19 U3.N10@2426.84,1358
  Layer 4 w8: v2(2112.53,1329.8) 2189.85,1329.8 2206.96,1346.91 2378.7,1346.91 v2(2399.58,1367.8)
  Bottom Layer w8: C28.2@2348.44,1387.66 2368.3,1367.8 2397.73,1367.8 2398.58,1368.64 v2@2398.58,1368.8 ; C28.2@2352.58,1391.8 2353.52,1392.73 2353.52,1410.8 TP14.1@2378.35,1435.63
VSW_J: L7.1 U22.T19 | length 56.9
  Top Layer w10: U22.T19@1063.61,570.56 1063.61,514.95 L7.1@1064.53,514.04
VSW_S: L1.1 U3.M13 | length 103.8
  Bottom Layer w10: L1.1@2393.53,1231.23 2393.53,1261.75 2413.58,1281.8 2438.72,1281.8 2444.58,1287.65 2444.58,1297.8 v4@2445.58,1298.8
  other v4: 2446.52,1298.95
pads on no net: ANT1.2 H1.1 H2.1 H3.1 H4.1 J2. J2.A8 J2.B8 J3. J3.A8 J3.B8 J7.4 J7.5 J7.6 J8.4 J8.5 J8.6 J9.10 J11.13 J11.14 J11.22 J11.24 J11.27 J11.29 J12.11 J12.13 J15.2 J16.1 J16.3 J16.5 J16.8 J17.2 J22.3 J22.15 J22.16 J22.17 J22.18 J22.19 J22.20 J22.21 SW1.2 SW3. SW5.3 U1.3 U2.3 U3.0 U6.A2 U6.B5 U7.A2 U7.B5 U8.E2 U9.25 U9.27 U11.4 U14.0 U14.4 U14.5 U16.0 U16.4 U16.5 U19.3 U19.7 U19.8 U19.9 U19.10 U19.13 U19.21 U19.22 U19.25 U19.26 U19.27 U19.31 U19.32 U22.A6 U22.A7 U22.A8 U22.A9 U22.A10 U22.A11 U22.A12 U22.A15 U22.A16 U22.A17 U22.B1 U22.B3 U22.B4 U22.B6 U22.B7 U22.B8 U22.B9 U22.B11 U22.B12 U22.B13 U22.B14 U22.B15 U22.B18 U22.B19 U22.C1 U22.C2 U22.C3 U22.C19 U22.D1 U22.D2 U22.E2 U22.E5 U22.E6 U22.E7 U22.E9 U22.E10 U22.E11 U22.E12 U22.E13 U22.E14 U22.F1 U22.F2 U22.F5 U22.F15 U22.F18 U22.G1 U22.G2 U22.G15 U22.G18 U22.G19 U22.H1 U22.H2 U22.H15 U22.H18 U22.H19 U22.J1 U22.J2 U22.J9 U22.J15 U22.J18 U22.J19 U22.K1 U22.K2 U22.K8 U22.K12 U22.K15 U22.K18 U22.K19 U22.L1 U22.L8 U22.L9 U22.L11 U22.L12 U22.L15 U22.L18 U22.L19 U22.M1 U22.M2 U22.M19 U22.N1 U22.N2 U22.N5 U22.N15 U22.P1 U22.P2 U22.P5 U22.P15 U22.R1 U22.R2 U22.R5 U22.R6 U22.R7 U22.R8 U22.R11 U22.R12 U22.R13 U22.R15 U22.R19 U22.T2 U22.U1 U22.U2 U22.U3 U22.V1 U22.V2 U22.V3 U22.V4 U22.V5 U22.V9 U22.V10 U22.V11 U22.V13 U22.V14 U22.V15 U22.V16 U22.W2 U22.W4 U22.W5 U22.W9 U22.W10 U22.W11 U22.W14 U22.W15 U22.W16